# Altium PCB CS1238-24-Bit-ADC.PcbDoc
Units mm, origin at the board's own origin, x right, y up, seen from the top; angles counter-clockwise.
Board outline 34 x 20 mm, 2 copper layers (Top Layer, Bottom Layer); 20 components, 14 nets, 66 pads, 9 vias.
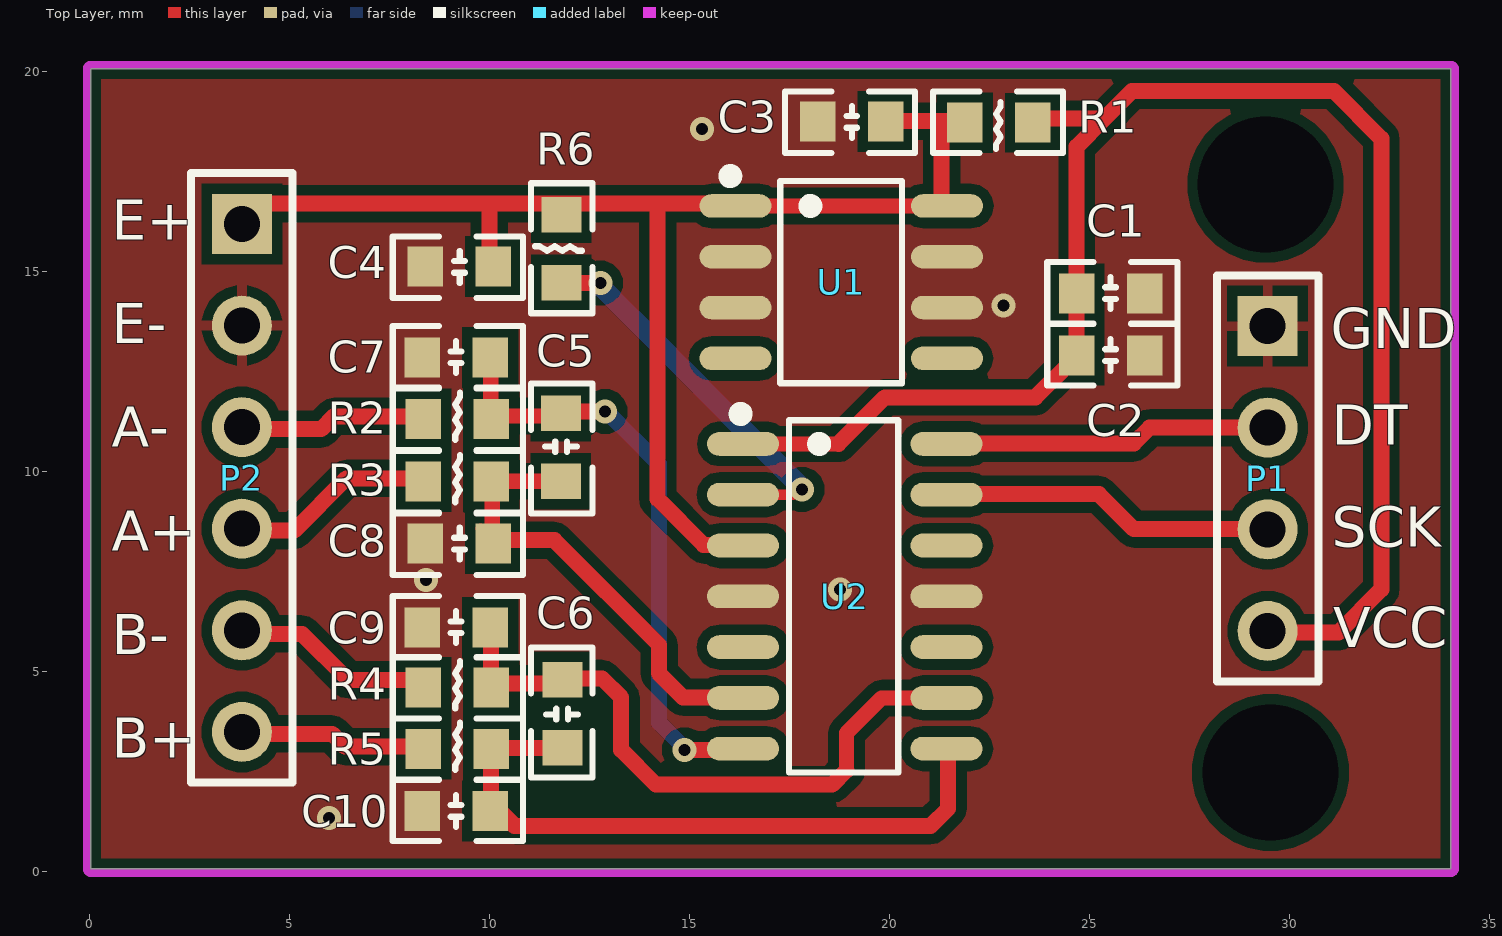
[diagram p0: Top Layer view]
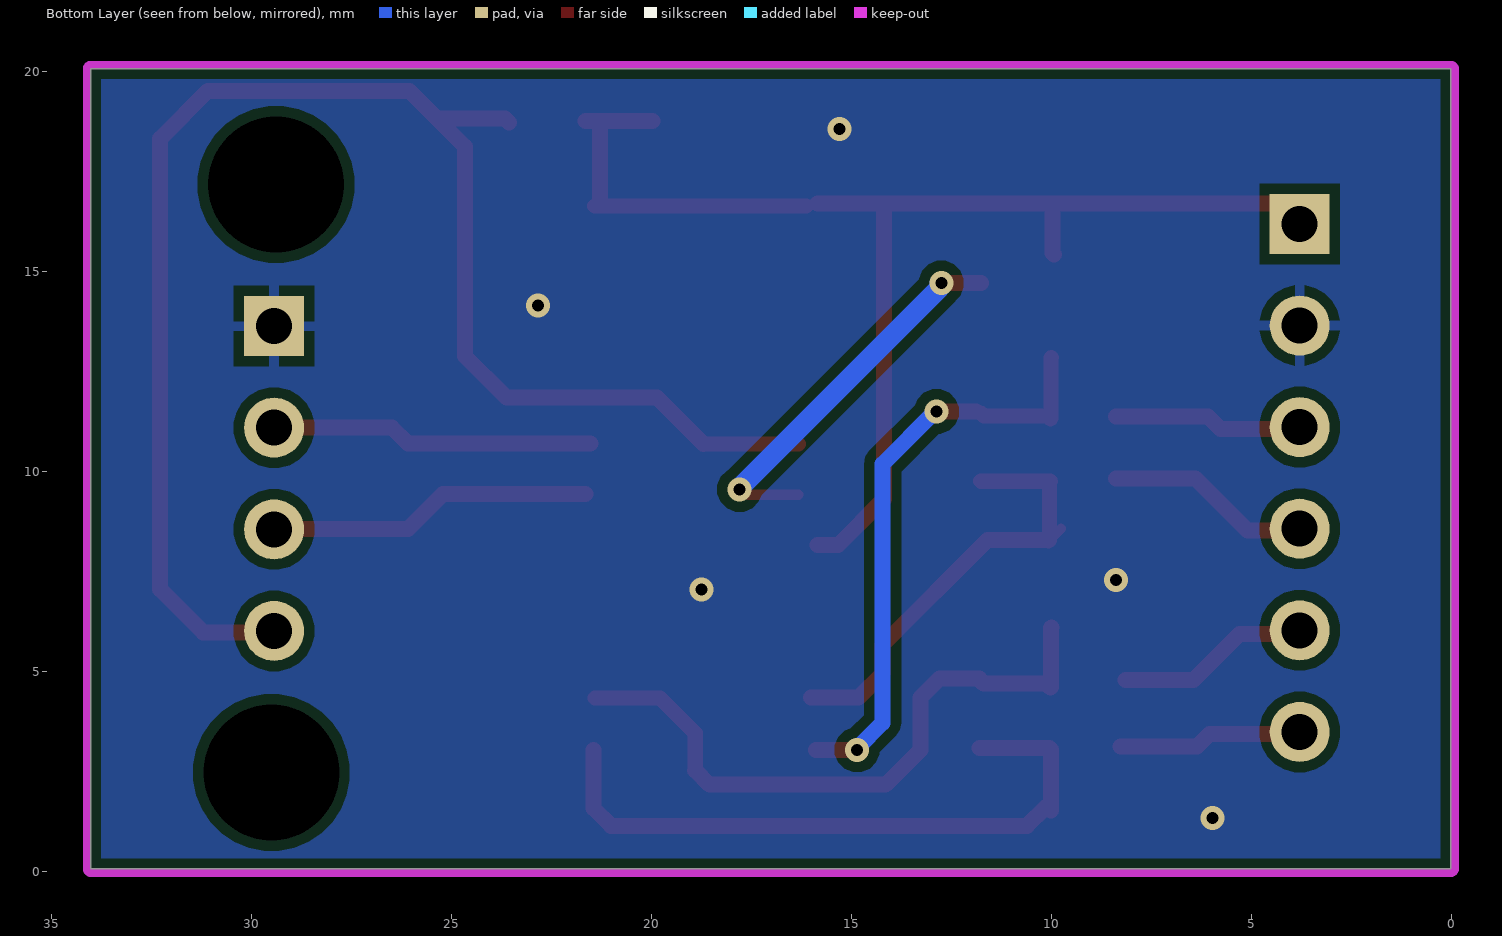
[diagram p1: Bottom Layer view, seen from below]

## Layer stack, top to bottom
Top Solder: solder mask 0.0102, Solder Resist, Dk 3.5
Top Layer: signal copper 0.0356
Dielectric 1: dielectric 0.32, FR-4, Dk 4.8
Bottom Layer: signal copper 0.0356
Bottom Solder: solder mask 0.0102, Solder Resist, Dk 3.5

## Board outline
0.021,0.061 34.021,0.061 34.021,20.061 0.021,20.061

## Design rules (kind name [scope] priority, off if disabled: settings)
Clearance [All] p1: gap=0.254 ignorepadtopadclearanceinfootprint=FALSE
PolygonConnect [All] p1: thpad.connectstyle=Relief thpad.reliefconductorwidth=0.254 thpad.reliefentries=4 thpad.polygonreliefangle="90 Angle" thpad.airgapwidth=0.254 smdpad.connectstyle=Direct smdpad.reliefconductorwidth=0.254 smdpad.reliefentries=4 smdpad.polygonreliefangle="90 Angle" smdpad.airgapwidth=0.254 via.connectstyle=Direct via.reliefconductorwidth=0.254 via.reliefentries=4 via.polygonreliefangle="90 Angle" via.airgapwidth=0.254
RoutingVias [All] p1: holewidth=0.711 width=1.27 viastyle="Through Hole" minholewidth=0.711 minwidth=1.27 maxholewidth=0.711 maxwidth=1.27
SolderMaskExpansion [All] p1: expansion=0.102 istentingtop=FALSE
SupplyNets "Schematic Supply Nets_4" [InNet('GND')] p1: voltage=0.000
SupplyNets "Schematic Supply Nets_2" [InNet('DVDD')] p2: voltage=0.000
SupplyNets "Schematic Supply Nets_1" [InNet('AVDD')] p3: voltage=0.000
Width [All] p1: maxlimit=2 minlimit=0.15 preferedwidth=0.254
30 further rules are at their usual default settings.

## Components (designator, comment, footprint, x,y, rotation, side; value= is the part's Value field where it differs from the comment)
C1 "1uF" C0603 25.522,14.449 r0 top
C2 "100nF" C0603 25.522,12.899 r0 top
C3 "100nF" C0603 19.039,18.741 r180 top
C4 "100nF" C0603 9.232,15.117 r180 top
C5 "100nF" C0603 11.771,10.605 r270 top
C6 "100nF" C0603 11.809,3.938 r90 top
C7 "10nF" C0603 9.159,12.847 r0 top
C8 "10nF" C0603 9.232,8.198 r180 top
C9 "10nF" C0603 9.159,6.097 r0 top
C10 "10nF" C0603 9.159,1.502 r0 top
P1 "" HDR1X4 29.442,13.629 r270 top
P2 "Header 6" HDR1X6 3.799,16.184 r270 top
R1 "1kΩ" R0603 22.716,18.716 r0 top
R2 "1kΩ" R0603 9.182,11.31 r180 top
R3 "1kΩ" R0603 9.182,9.748 r180 top
R4 "1kΩ" R0603 9.182,4.591 r180 top
R5 "1kΩ" R0603 9.182,3.059 r180 top
R6 "0Ω" R0603 11.784,15.564 r270 top
U1 "TL431BIDR" SOIC-8E 18.781,14.728 r0 top
U2 "CS1238-SOP14" SOP-14_L8.6-W3.9-P1.27-LS6.0-BL 18.999,6.875 r270 top

## Footprints (in the part's own frame and the unit in brackets; to place one, negate y for a bottom-side part, rotate by r counter-clockwise, add the part's x,y. Pads: shape width x height; smd on the part's side, far side on the other; paste and mask are expansions set on the pad)
C0603 [mm]
  rect 0.889x1 smd: 1(-0.85,0) 2(0.85,0)
  silkscreen extent -1.59,-0.75 1.66,0.79, body extent -0.77,-0.38 0.83,0.42, height 0.8
HDR1X4 [mm] "Connector; Header; 4 Position"
  rect 1.5x1.5 hole 0.9: 1(0,0)
  round 1.5 hole 0.9: 2(2.54,0) 3(5.08,0) 4(7.62,0)
  silkscreen extent -1.27,-1.27 8.89,1.27
HDR1X6 [mm] "Connector; Header; 6 Position"
  rect 1.5x1.5 hole 0.9: 1(0,0)
  round 1.5 hole 0.9: 2(2.54,0) 3(5.08,0) 4(7.62,0) 5(10.16,0) 6(12.7,0)
  silkscreen extent -1.27,-1.27 13.97,1.27
R0603 [mm]
  rect 0.889x1 smd: 1(-0.85,0) 2(0.85,0)
  silkscreen extent -1.64,-0.76 1.61,0.77, body extent -1.07,-0.39 1.03,0.41, height 0.5
SOIC-8E [mm]
  oval 1.8x0.588 smd paste+0 mask+0.051: 1(-2.646,1.905) 2(-2.646,0.635) 3(-2.646,-0.635) 4(-2.646,-1.905) 5(2.646,-1.905) 6(2.646,-0.635) 7(2.646,0.635) 8(2.646,1.905)
  silkscreen extent -2.92,-2.53 1.52,2.8, body extent -3,-2.5 3,2.5, height 1.75
SOP-14_L8.6-W3.9-P1.27-LS6.0-BL [mm]
  oval 0.595x1.8 smd paste+0 mask+0.051: 1(-3.81,-2.67) 2(-2.54,-2.67) 3(-1.27,-2.67) 4(0,-2.67) 5(1.27,-2.67) 6(2.54,-2.67) 7(3.81,-2.67) 8(3.81,2.416) 9(2.54,2.416) 10(1.27,2.416) 11(0,2.416) 12(-1.27,2.416) 13(-2.54,2.416) 14(-3.81,2.416)
  silkscreen extent -4.71,-2.88 4.4,1.21, body extent -4.32,-3.15 4.32,2.9, height 1.62

## Part data
C1 C2 C3 C4 C5 C6 C7 C8 C9 C10: library part Cap_0603, "Capacitor, X5R, ±10%, 6.3V", Manufacturer=N.A., Part Number=C0603-N.C., Volts=6.3V, Artikkelnr Noca=20069060, Artikkelnr Simpro=N.A., Footprint Doc=0603, LatestRevisionDate=2009-11-23, Manufacturer Part Number=N.A., Pin Count=2, Published=2009-05-08, Publisher="Nordic Semiconductor"
P1: library part "Header 4", "Header, 4-Pin", LatestRevisionDate=17-Jul-2002, LatestRevisionNote="Re-released for DXP Platform.", Publisher="Altium Limited"
P2: "Header, 6-Pin", LatestRevisionDate=17-Jul-2002, LatestRevisionNote="Re-released for DXP Platform.", Publisher="Altium Limited"
R1 R2 R3 R4 R5 R6: library part Res_0603, "Resistor, ±1%, 0.100W", Manufacturer=N.A., Part Number=R0603-N.C.Ω, Artikkelnr Noca=N.A., Artikkelnr Simpro=N.A., Footprint Doc=0603, LatestRevisionDate=2009-05-08, Manufacturer Part Number=N.A., Note="Chip Res", Pin Count=2, Published=2009-05-08, Publisher="Nordic Semiconductor"
U1: "TL431, TL432 Precision Programmable Reference", Input Voltage=-, JLCPCB Part Class="Extended Part", Manufacturer=TI(德州仪器), Minimum Cathode Current for Regulation=700uA, Operating Temperature=-40℃~+85℃@(Ta), Output Current=100mA, Output Voltage=2.495V~36V, Tolerance=±0.5%, Add into BOM=yes, Convert to PCB=yes, Datasheet=https://www.ti.com/cn/lit/gpn/tl431, Device=TL431BIDR, LCSC Part Name=TL431BIDR, Manufacturer Part=TL431BIDR, Noise - 1/10Hz to 10Hz=-, Noise - 10Hz to 10kHz=-, Output Type=Adjustable, Reference Type="parallel connection", Supplier=LCSC, Supplier Footprint=SOIC-8, Supplier Part=C366884, Supply Current=-, Symbol=TL431BIDR, Temperature Coefficient=-
U2: JLCPCB Part Class="Extended Part", LCSC Part Name=CS1238-SO, Manufacturer=CHIPSEA(芯海科技), Add into BOM=yes, Convert to PCB=yes, Datasheet=https://atta.szlcsc.com/upload/public/pdf/source/20160919/1474265371144.pdf, Device=CS1238-SOP14, Manufacturer Part=CS1238-SOP14, Supplier=LCSC, Supplier Footprint=SOP-14, Supplier Part=C81829, Symbol=CS1238

## Free pads (board coordinates)
  round 3.2 hole 3.4: 1(29.39,17.167) 1(29.509,2.471)

## Via types
v1: diameter 0.6, hole 0.3, Top Layer to Bottom Layer, tented both sides, 9 vias

## Nets (pads, with @x,y where several pads share a name; then routed paths per layer and width w, separated by ;. In a path a pad name is that pad's centre, name@x,y a point inside that pad or via, vN(x,y) a via of type N, cw(c..) or ccw(c..) an arc to the next point about the centre after c; other vN are vias at no path point)
A+: P2.4 R3.2 | length 5.1
  Top Layer w0.4: P2.4@3.871,8.515 5.101,8.515 6.411,9.825 R3.2@8.396,9.825
A-: P2.3 R2.2 | length 4.5
  Top Layer w0.4: P2.3@4.03,11.055 5.776,11.055 6.094,11.372 R2.2@8.396,11.372
AINN1: C5.1 C7.2 R2.1 U2.7 | length 14.6
  Top Layer w0.381: C7.2 10.021,12.835 10.021,11.322 R2.1 10.105,11.382 11.698,11.382 C5.1
  Top Layer w0.4: C5.1@11.888,11.491 v1(12.88,11.491) ; v1(14.865,3.038) U2.7@15.896,3.038
  Bottom Layer w0.4: v1@12.92,11.491 14.23,10.182 14.23,3.713 14.865,3.078 v1(14.865,3.038)
AINN2: C6.2 C9.2 R4.1 U2.9 | length 16.3
  Top Layer w0.381: 18.913,2.522 18.913,3.459 19.789,4.335 U2.9
  Top Layer w0.4: C9.2 10.021,6.086 10.021,4.603 R4.1 10.131,4.689 11.711,4.689 C6.2 ; C6.2@11.809,4.824 12.801,4.824 13.277,4.348 13.277,3.038 14.15,2.165 18.556,2.165 18.913,2.522
AINP1: C5.2 C8.1 R3.1 U2.6 | length 11.7
  Top Layer w0.254: C8.1@9.764,8.571 C8.1@10.082,8.254 ; C8.1@10.057,8.278 C8.1@10.082,8.254 ; C8.1 C8.1@10.082,8.254
  Top Layer w0.381: C8.1@10.057,8.278 10.057,9.723 R3.1 10.036,9.751 11.767,9.751 C5.2
  Top Layer w0.4: C8.1@10.142,8.277 11.61,8.277 14.23,5.657 14.23,4.943 14.825,4.348 U2.6@16.016,4.348
AINP2: C6.1 C10.2 R5.1 U2.8 | length 16.6
  Top Layer w0.254: C10.2 C10.2@10.009,1.558 ; R5.1 R5.1@10.061,3.088
  Top Layer w0.4: C10.2@10.021,1.514 10.021,3.048 R5.1 ; R5.1@10.061,3.088 C6.1 ; C10.2@10.142,1.609 10.618,1.133 21.016,1.133 21.453,1.57 U2.8@21.453,3.038
AVDD: C3.1 C4.1 P2.1 R1.1 R6.1 U1.1 U1.8 U2.3 | length 31.9
  Top Layer w0.381: U1.1 U1.8
  Top Layer w0.4: P2.1@3.831,16.294 3.951,16.294 4.308,16.651 4.427,16.651 4.466,16.691 9.983,16.691 ; C4.1@9.943,15.421 9.983,15.46 9.983,16.691 ; 14.19,16.611 14.19,9.309 15.341,8.158 U2.3@15.857,8.158 ; U1.1@15.857,16.691 9.983,16.691 ; C3.1@19.984,18.754 R1.1@21.651,18.754 ; U1.8@21.294,16.77 21.294,18.754
B+: P2.6 R5.2 | length 4.4
  Top Layer w0.4: P2.6@3.99,3.475 4.03,3.435 6.054,3.435 6.371,3.117 R5.2@8.276,3.117
B-: P2.5 R4.2 | length 4.7
  Top Layer w0.4: P2.5@3.951,5.896 3.99,5.935 5.3,5.935 6.451,4.784 R4.2@8.157,4.784
DOUT: P1.2 U2.14 | length 8.2
  Top Layer w0.4: U2.14@21.532,10.698 26.096,10.698 26.493,11.095 29.351,11.095 P1.2@29.47,11.214
DVDD: C1.1 C2.1 P1.4 R1.2 U2.1 | length 39.5
  Top Layer w0.381: U2.1 18.709,10.685
  Top Layer w0.4: 18.709,10.685 19.873,11.849 23.636,11.849 24.667,12.881 24.667,18.119 25.362,18.814 ; R1.2 23.663,18.814 25.362,18.814 ; P1.4@29.47,5.975 31.216,5.975 32.287,7.046 32.287,18.318 31.097,19.508 26.056,19.508 25.362,18.814
GND: C1.2 C2.2 C3.2 C4.2 C7.1 C8.2 C9.1 C10.1 P1.1 P2.2 U1.2 U1.3 U1.6 U1.7 U2.4 U2.11
  other v1: 5.975,1.331 18.754,7.046 8.396,7.285 22.842,14.151 15.301,18.556
NetR6_2: R6.2 U2.2 | length 9.6
  Top Layer w0.254: U2.2 17.576,9.415 17.708,9.547 v1(17.801,9.547)
  Top Layer w0.4: R6.2@11.769,14.706 v1(12.761,14.706)
  Bottom Layer w0.5: v1@12.801,14.706 12.801,14.587 v1@17.722,9.666
SCK: P1.3 U2.13 | length 8.1
  Top Layer w0.4: U2.13@21.651,9.428 25.223,9.428 26.096,8.555 P1.3@29.351,8.555
pads on no net: U1.4 U1.5 U2.5 U2.10 U2.12

## Polygon pours and split planes (outlines as drawn)
GND on Bottom Layer "NONET_L02_P-001" (solid, remove dead copper, pour order 0): -0.106,20.445 -0.106,0.061 34.021,0.061 34.021,20.061 -0.042,20.061 -0.042,20.381
GND on Top Layer "NONET_L02_P-001" (solid, remove dead copper, pour order 1): -0.233,19.937 -0.106,20.064 33.994,20.064 33.994,0.188 34.248,-0.066 34.184,-0.129 0.085,-0.129 0.085,19.81 -0.106,20

## Keep-outs
Keep-Out Layer:
  lines w0.2: -0.079,0.061 ccw(c0.021,0.061) 0.021,-0.039 ; -0.079,0.061 ccw(c0.021,0.061) 0.021,-0.039 ; -0.079,0.061 -0.079,20.061 ; -0.079,20.061 cw(c0.021,20.061) 0.021,20.161 ; -0.079,20.061 cw(c0.021,20.061) 0.021,20.161 ; 0.021,-0.039 34.021,-0.039 ; 0.021,20.161 34.021,20.161 ; 34.021,-0.039 ccw(c34.021,0.061) 34.121,0.061 ; 34.021,-0.039 ccw(c34.021,0.061) 34.121,0.061 ; 34.021,20.161 cw(c34.021,20.061) 34.121,20.061 ; 34.021,20.161 cw(c34.021,20.061) 34.121,20.061 ; 34.121,0.061 34.121,20.061

## Silkscreen, mask and mechanical layers (free items; w line width, h text height)
Top Overlay:
  text "E+" at 0.546,15.791 h1
  text "E-" at 0.546,13.2 h1
  text "GND" at 31.021,13.074 h1
  text "DT" at 31.047,10.658 h1
  text "A-" at 0.546,10.609 h1
  text "SCK" at 31.047,8.113 h1
  text "A+" at 0.546,8.017 h1
  text "VCC" at 31.079,5.605 h1
  text "B-" at 0.546,5.426 h1
  text "B+" at 0.546,2.835 h1